# Altium PCB board.PcbDoc
Units mil, origin at the board's own origin, x right, y up, seen from the top; angles counter-clockwise.
Board outline 2300 x 3600 mil, 2 copper layers (Top Layer, Bottom Layer); 46 components, 41 nets, 168 pads, 5 vias.
Unrouted connection lines stored in the file: 35.
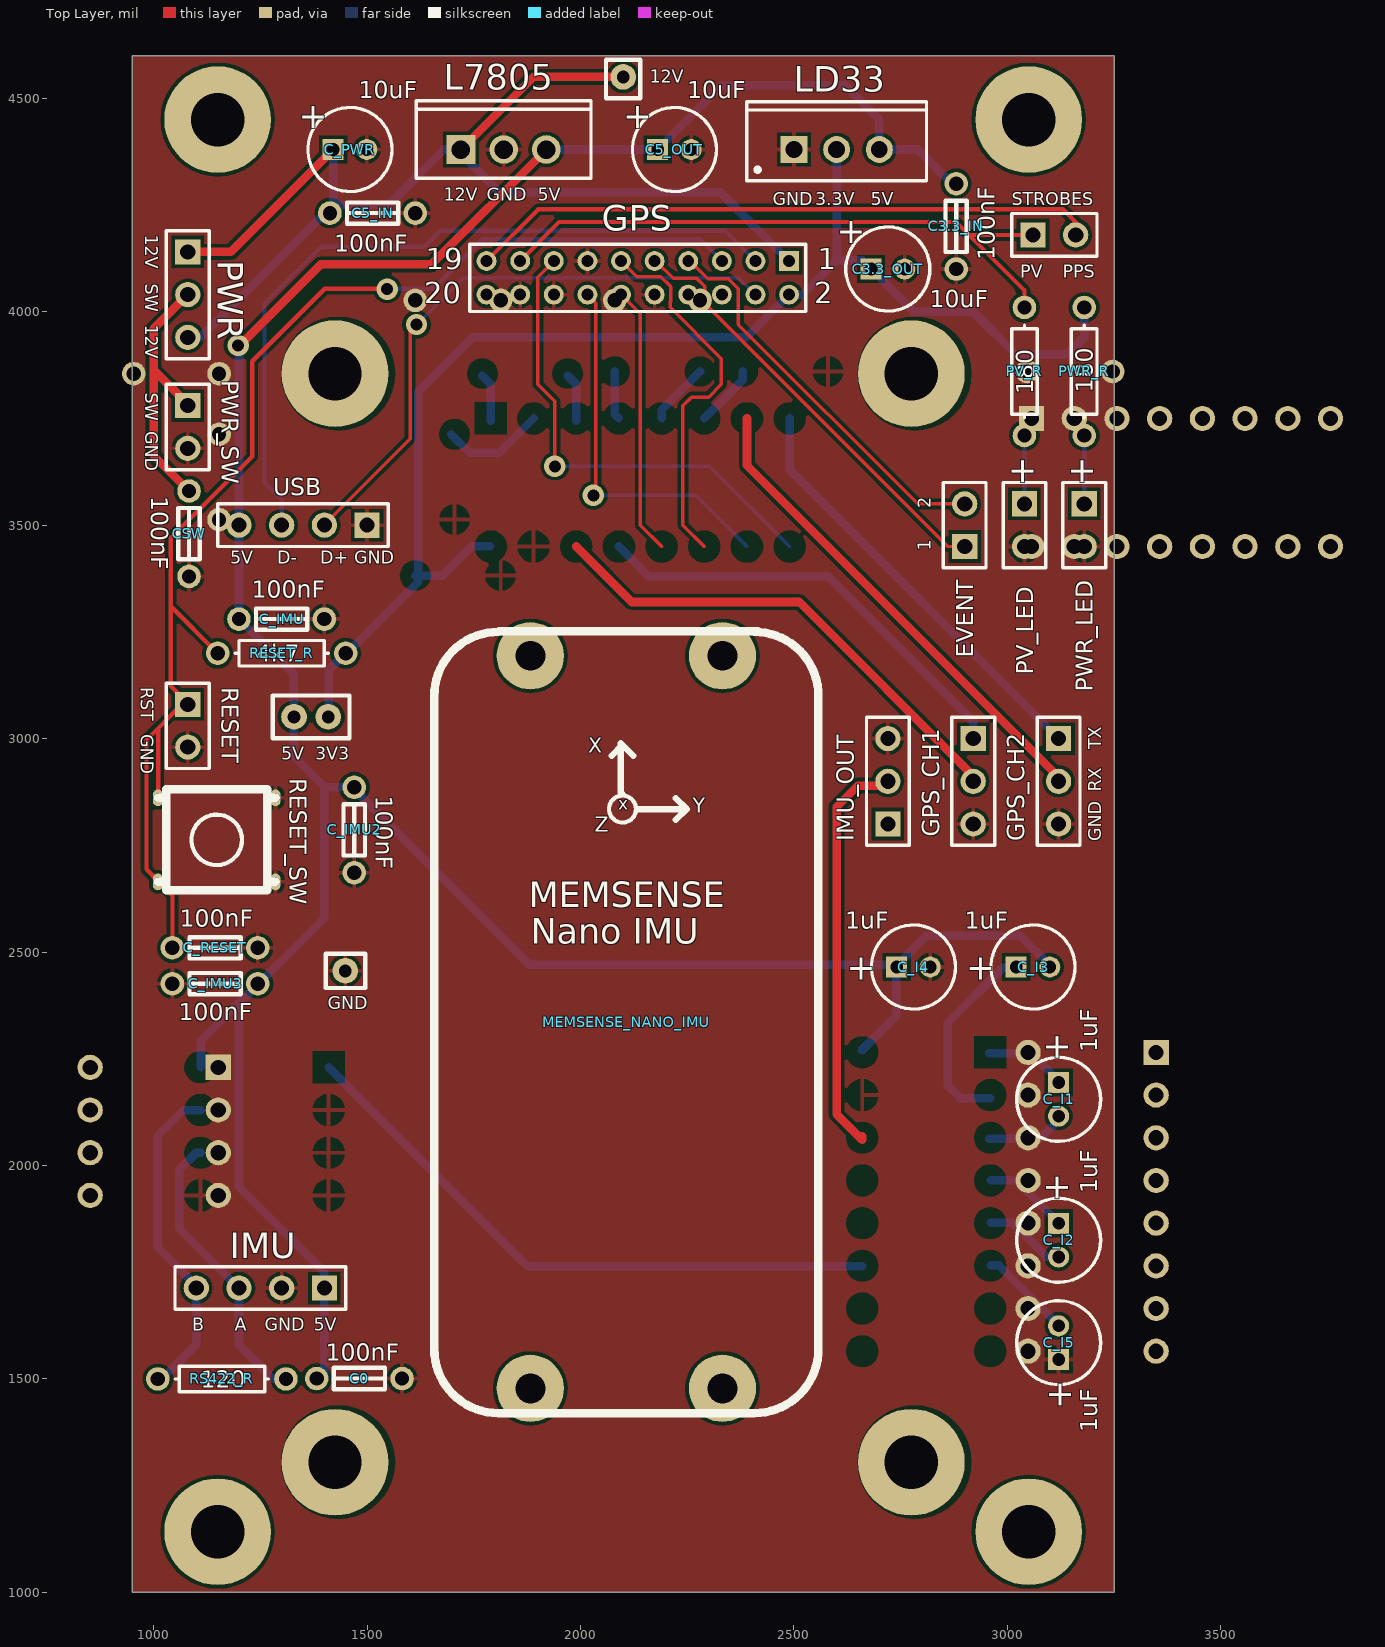
[diagram p0: Top Layer view]
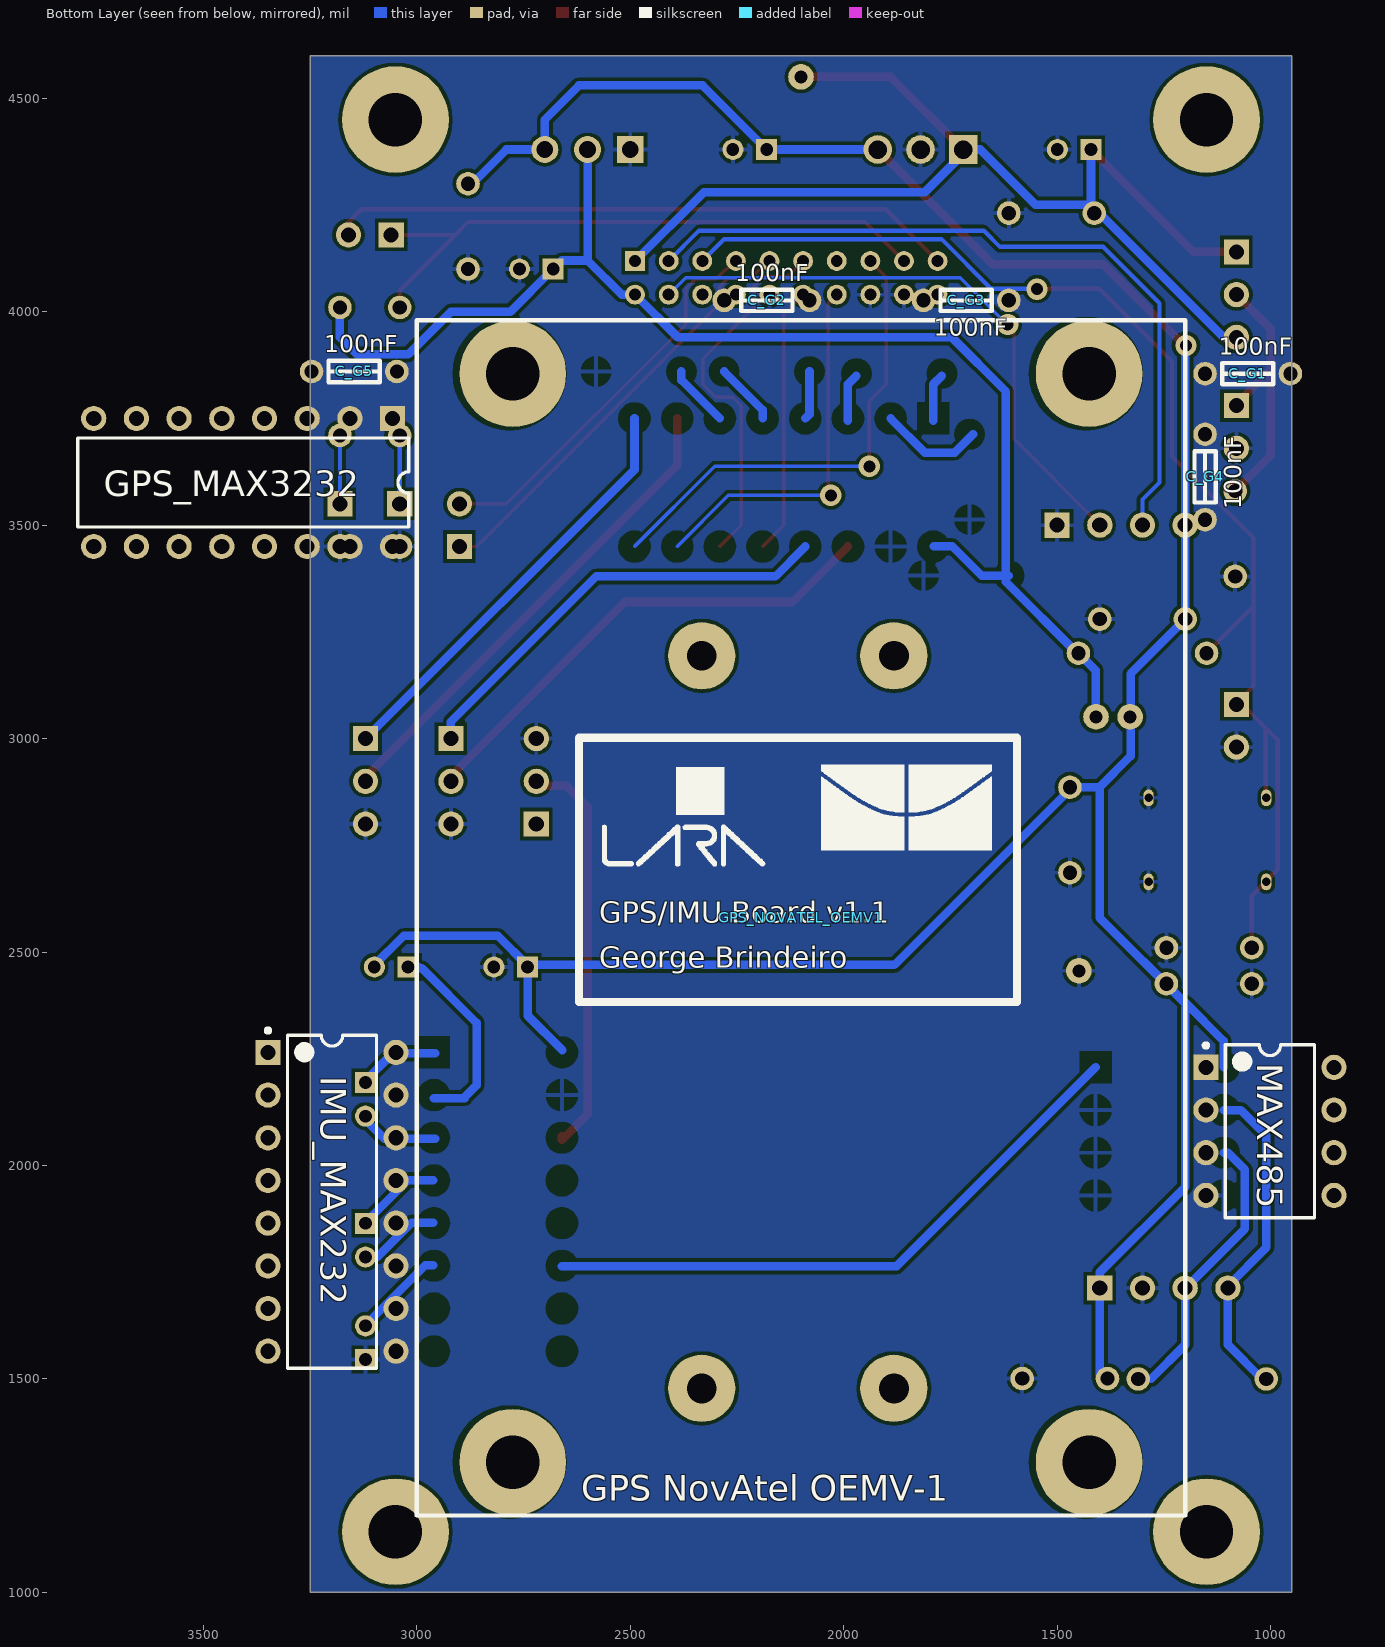
[diagram p1: Bottom Layer view, seen from below]

## Layer stack, top to bottom
Top Solder: solder mask 0.4, Solder Resist, Dk 3.5
Top Layer: signal copper 1.4
Dielectric1: dielectric 12.6, FR-4, Dk 4.8
Bottom Layer: signal copper 1.4
Bottom Solder: solder mask 0.4, Solder Resist, Dk 3.5

## Board outline
950,1000 3250,1000 3250,4600 950,4600

## Design rules (kind name [scope] priority, off if disabled: settings)
Clearance [All] p1: gap=8 ignorepadtopadclearanceinfootprint=FALSE except(0: Arc-Hole Track-Hole SMDPad-Hole THPad-Hole Via-Hole Fill-Hole Poly-Hole Region-Hole Text-Hole)
FabricationTestPointUsage TestPointUsage [All] p1: valid=0 allowmultiple=FALSE
FabricationTestpoint Testpoint [All] p1: side=3 testpointundercomponent=TRUE minsize=40 maxsize=100 preferedsize=60 minholesize=0 maxholesize=40 preferedholesize=32 testpointgrid=1 allowsidetop=TRUE allowsidebottom=TRUE usegrid=TRUE gridtolerance=0.01
HoleSize [All] p1: absolutevalues=TRUE maxlimit=100 minlimit=20 maxpercent=80.000 minpercent=20.000
PolygonConnect [All] p1: connectstyle=Relief reliefconductorwidth=10 reliefentries=4 polygonreliefangle="90 Angle" airgapwidth=10
RoomDefinition schematic [InComponentClass('schematic')] p1: confinementstyle=ConfineIn formatcopy=TRUE lockcomponents=FALSE outline 830,790 63,790 63,4750 830,4750
RoutingVias [All] p1: holewidth=28 width=50 viastyle="Through Hole" minholewidth=28 minwidth=50 maxholewidth=28 maxwidth=50
SilkToSolderMaskClearance SilkscreenOverComponentPads [IsPad] p1: minsilkscreentomaskgap=10 clearancetoexposedcopper=TRUE
SolderMaskExpansion [All] p1: expansion=4
Width [All] p1: maxlimit=20 minlimit=8 preferedwidth=10
26 further rules are at their usual default settings.

## Components (designator, comment, footprint, x,y, rotation, side; value= is the part's Value field where it differs from the comment)
C0 "100nF" C_NANO_HOLES 1582,1501 r180 top
C3.3_IN "100nF" C_NANO_HOLES 2880,4300 r270 top
C3.3_OUT "10uF" B 2720,4100 r0 top
C5_IN "100nF" C_NANO_HOLES 1413,4231 r0 top
C5_OUT "10uF" B 2220,4380 r0 top
C_G1 "100nF" C_NANO_HOLES 1153.43,3855 r180 bottom
C_G2 "100nF" C_NANO_HOLES 2280,4026.57 r180 bottom
C_G3 "100nF" C_NANO_HOLES 1813,4026.57 r180 bottom
C_G4 "100nF" C_NANO_HOLES 1153.43,3513 r90 bottom
C_G5 "100nF" C_NANO_HOLES 3246.57,3860 r180 bottom
C_I1 "1uF" B 3120,2155 r270 top
C_I2 "1uF" B 3120,1825 r270 top
C_I3 "1uF" B 3060,2465 r0 top
C_I4 "1uF" B 2780,2465 r0 top
C_I5 "1uF" B 3120,1585 r90 top
C_IMU "100nF" C_NANO_HOLES 1400,3280 r180 top
C_IMU2 "100nF" C_NANO_HOLES 1470,2686 r90 top
C_IMU3 "100nF" C_NANO_HOLES 1044,2426 r0 top
C_PWR "10uF" B 1460,4380 r0 top
C_RESET "100nF" C_NANO_HOLES 1244,2510 r180 top
CSW "100nF" C_NANO_HOLES 1083,3580 r270 top
EVENT "Header 2" HDR1X2 2900,3450 r90 top
GPS "Header 10X2" HDR2x10_2mm 1780,4040 r0 top
GPS_CH1 "MHDR1X3" HDR1X3 2920,3000 r270 top
GPS_CH2 "MHDR1X3" HDR1X3 3120,3000 r270 top
GPS_MAX3232 "MAX3232EEPE" PE16 3406.74,3600 r0 bottom
GPS_NOVATEL_OEMV1 "Comment" GPS_NOVATEL_OEMV1 2100,2580 r180 bottom
IMU "Header 4" HDR1X4 1400,1713 r180 top
IMU_MAX232 "MAX232ACPE" PE16A 3198.54,1915 r180 bottom
IMU_OUT "MHDR1X3" HDR1X3 2720,2800 r90 top
L7805 "L7805ACV" TO220ABN 1820,4380 r0 top
LD33 "LD33V" T03B 2600,4380 r0 top
MAX485 "MAX485CPA" PA8 1001.46,2080 r180 bottom (schematic designator IMU_MAX485)
MEMSENSE_NANO_IMU "Comment" MEMSENSE_NANO_IMU 1657.46,1420 r0 top
PV_LED "PV" HDR1X2 3040,3550 r270 top
PV_R "180" AXIAL-0.3 3040,3860 r90 top
PWR "Header 3" HDR1X3 1080,4140 r270 top
PWR_LED "PWR" HDR1X2 3180,3550 r270 top
PWR_R "180" AXIAL-0.3 3180,3860 r90 top
PWR_SW "Header 2" HDR1X2 1080,3780 r270 top
RESET "Header 2" HDR1X2 1080,3080 r270 top
RESET_R "4k7" AXIAL-0.3 1300,3200 r0 top
RESET_SW "SW-PB" PUSHBUTTON 1266,2881 r180 top
RS422_R "120" AXIAL-0.3 1160,1500 r180 top
STROBES "Header 2" HDR1X2 3060,4180 r0 top
USB "Header 4" HDR1X4 1500,3500 r180 top

## Footprints (in the part's own frame and the unit in brackets; to place one, negate y for a bottom-side part, rotate by r counter-clockwise, add the part's x,y. Pads: shape width x height; smd on the part's side, far side on the other; paste and mask are expansions set on the pad)
AXIAL-0.3 [mm] "Resistor; 2 Leads"
  round 1.4 hole 0.85: 1(-3.81,0) 2(3.81,0)
  silkscreen extent -2.77,-0.76 2.77,0.76
B [mm] "Capacitor, Electrolytic, Radial; Body 5 x 6.8 mm (Dia.xH typ); Pin Spacing 2 mm (typ)"
  rect 1.25x1.25 hole 0.75: 1(-1,0)
  round 1.25 hole 0.75: 2(1,0)
  silkscreen extent -2.5,-2.5 2.5,2.5
C_NANO_HOLES [mm] "C_NANO com furos maiores"
  round 1.4 hole 0.85: 1(0,0) 2(5.08,0)
  silkscreen extent 1.02,-0.63 4.06,0.64
GPS_NOVATEL_OEMV1 [mil]
  round 250 hole 125: 0(675,1275) 1(-675,1275) 2(-675,-1275) 3(675,-1275)
  silkscreen extent -900,-1400 900,1400
HDR1X2 [mm] "Connector; Header; 2 Position"
  rect 1.5x1.5 hole 0.9: 1(0,0)
  round 1.5 hole 0.9: 2(2.54,0)
  silkscreen extent -1.27,-1.27 3.81,1.27
HDR1X3 [mm] "Connector; Header; 3 Position"
  rect 1.5x1.5 hole 0.9: 1(0,0)
  round 1.5 hole 0.9: 2(2.54,0) 3(5.08,0)
  silkscreen extent -1.27,-1.27 6.35,1.27
HDR1X4 [mm] "Connector; Header; 4 Position"
  rect 1.5x1.5 hole 0.9: 1(0,0)
  round 1.5 hole 0.9: 2(2.54,0) 3(5.08,0) 4(7.62,0)
  silkscreen extent -1.27,-1.27 8.89,1.27
HDR2x10_2mm [mm]
  rect 1.18x1.18 hole 0.71: 1(18,2)
  round 1.18 hole 0.71: 2(18,0) 3(16,2) 4(16,0) 5(14,2) 6(14,0) 7(12,2) 8(12,0) 9(10,2) 10(10,0) 11(8,2) 12(8,0) 13(6,2) 14(6,0) 15(4,2) 16(4,0) 17(2,2) 18(2,0) 19(0,2) 20(0,0)
  silkscreen extent -1,-1 19,3
MEMSENSE_NANO_IMU [mil]
  round 157.48 hole 70: 0(225,1774) 1(675,1774) 2(225,58) 3(675,58)
  silkscreen extent 0,0 900,1832
PA8 [mm] "DIP, 8-Leads, Row Spacing 7.62mm, Pitch 2.54mm, Body 9.38x7.24mm"
  rect 1.5x1.5 hole 0.9: 1(-3.81,3.81)
  round 1.5 hole 0.9: 2(-3.81,1.27) 3(-3.81,-1.27) 4(-3.81,-3.81) 5(3.81,-3.81) 6(3.81,-1.27) 7(3.81,1.27) 8(3.81,3.81)
  silkscreen extent -3.94,-5.15 2.65,5.23, body extent -3.6,-5.15 3.6,5.15, height 4.58
PE16 [mm] "DIP; 16 Leads; Row Spacing 7.62 mm; Pitch 2.54 mm"
  rect 1.5x1.5 hole 0.9: 1(-8.89,-3.81)
  round 1.5 hole 0.9: 2(-6.35,-3.81) 3(-3.81,-3.81) 4(-1.27,-3.81) 5(1.27,-3.81) 6(3.81,-3.81) 7(6.35,-3.81) 8(8.89,-3.81) 9(8.89,3.81) 10(6.35,3.81) 11(3.81,3.81) 12(1.27,3.81) 13(-1.27,3.81) 14(-3.81,3.81) 15(-6.35,3.81) 16(-8.89,3.81)
  silkscreen extent -9.85,-2.65 9.85,2.65
PE16A [mm] "DIP, 16-Leads, Row Spacing 7.62mm, Pitch 2.54mm, Body 19.18x6.99mm"
  rect 1.5x1.5 hole 0.9: 1(-3.81,8.89)
  round 1.5 hole 0.9: 2(-3.81,6.35) 3(-3.81,3.81) 4(-3.81,1.27) 5(-3.81,-1.27) 6(-3.81,-3.81) 7(-3.81,-6.35) 8(-3.81,-8.89) 9(3.81,-8.89) 10(3.81,-6.35) 11(3.81,-3.81) 12(3.81,-1.27) 13(3.81,1.27) 14(3.81,3.81) 15(3.81,6.35) 16(3.81,8.89)
  silkscreen extent -3.94,-9.9 2.65,10.31, body extent -3.3,-9.9 3.3,9.9, height 5.08
PUSHBUTTON [mm]
  oval 0.6x1 hole 0.5: 1(-0.5,5.5) 1(-0.5,0.5) 2(6.5,5.5) 2(6.5,0.5)
  silkscreen extent -0.5,0 6.5,6
T03B [mm] "TO, Thru-Hole, Vertical, Heatsink Mounted; 3 In-Line Leads; Pitch 2.54 mm"
  rect 1.6x1.6 hole 1: 1(-2.54,0)
  round 1.6 hole 1: 2(0,0) 3(2.54,0)
  silkscreen extent -5.35,-1.85 5.35,2.85, body extent -5.4,-1.9 5.4,2.9, height 19.4
TO220ABN [mm] "TO, Thru-Hole, Vertical, Heatsink Mounted; 3 In-Line Leads; Pitch 2.54 mm; Pin sequence 1, 3, 2"
  rect 1.7x1.7 hole 1.1: 1(-2.54,0)
  round 1.7 hole 1.1: 2(2.54,0) 3(0,0)
  silkscreen extent -5.2,-1.7 5.2,2.9

## Part data
C0 C3.3_IN C5_IN C_G1 C_G2 C_G3 C_G4 C_G5 C_IMU C_IMU2 C_IMU3 C_RESET CSW: library part Cap, "Capacitor"
C3.3_OUT C5_OUT C_I1 C_I2 C_I3 C_I4 C_I5 C_PWR: library part "Cap Pol1", "Polarized Capacitor (Radial)"
EVENT STROBES: "Header, 2-Pin"
GPS: "Header, 10-Pin, Dual row"
GPS_CH1 GPS_CH2 IMU_OUT: "Header, 3-Pin"
GPS_MAX3232: "±15kV ESD-Protected, 3.0V to 5.5V, Low-Power, up to 250kbps, True RS-232 Transceiver"
IMU USB: "Header, 4-Pin"
IMU_MAX232: "+5V Powered, Multi-Channel RS-232 Driver/Receiver"
L7805: "Precision 1A Regulator"
LD33: library part LM1117T-3.3, "800mA Low-Dropout Linear Regulator"
MAX485: "Low-Power, Slew-Rate-Limited RS-485/RS-422 Transceiver"
PV_LED PWR_LED: library part LED0, "Typical INFRARED GaAs LED"
PV_R PWR_R RESET_R RS422_R: library part Res1, "Resistor"
PWR: library part "Header 3H", "Header, 3-Pin, Right Angle"
PWR_SW RESET: library part "Header 2H", "Header, 2-Pin, Right Angle"
RESET_SW: "Switch"

## Free pads (board coordinates)
  round 250 hole 125: 0(1150,4450) 1(3050,4450) 2(3050,1142) 3(1150,1142)
  round 60 hole 30: 0(1329,3051) 1(1409,3051) 2(2100,4550) 3(1449,2456)

## Via types
v1: diameter 50, hole 28, Top Layer to Bottom Layer, 5 vias

## Nets (pads, with @x,y where several pads share a name; then routed paths per layer and width w, separated by ;. In a path a pad name is that pad's centre, name@x,y a point inside that pad or via, vN(x,y) a via of type N, cw(c..) or ccw(c..) an arc to the next point about the centre after c; other vN are vias at no path point)
3.3V: C3.3_OUT.1 C_G3.2 GPS.2 GPS_MAX3232.16 LD33.2 pad.1@1409,3051 PWR_R.2 RESET_R.2 | length 3169.2
  Bottom Layer w20: pad.1@1410,3052 1410,3160 RESET_R.2 1453,3200 1620,3367 1620,3382 ; 1613,3382 1620,3382 ; 1789,3451 1746,3451 1677,3382 1620,3382 ; LD33.2 2600,4120 ; PWR_R.2@3180,4000 3180,3940 3140,3900 3020,3900 2920,4000 2780.63,4000 C3.3_OUT.1 2660.63,4120 2600,4120 ; 1620,3382 1620,3813 1747,3940 2388.66,3940 GPS.2 2520,4040 2600,4120
5V: C0.2 C3.3_IN.1 C5_OUT.1 C_I3.2 C_I4.1 C_IMU2.2 C_IMU3.2 C_IMU.2 IMU.1 IMU_MAX232.16 L7805.2 LD33.3 MAX485.8 pad.0@1329,3051 USB.4 | length 7065.8
  Top Layer w20: v1@1199.5,3918.5 1392,4111 1651,4111 L7805.2
  Bottom Layer w20: 1110,2230 1110,2292 1198,2380 1200,2380 1400,2580 1400,2887 1328,2959 1328,3152 C_IMU.2 USB.4 1200,3917 1203,3920 1202,3921 v1(1198,3921) ; 1200,2370 1200,1950 1400,1750 IMU.1 C0.2@1400,1500 ; 1401,2886 C_IMU2.2 ; C_IMU2.2@1471,2880 1881,2470 2738,2470 C_I4.1@2740,2468 ; L7805.2 C5_OUT.1 2330.63,4530 2620,4530 2700,4450 LD33.3 2790,4380 C3.3_IN.1@2865,4305 ; 2659,2270 2740,2351 C_I4.1@2740,2468 ; C_I4.1@2739,2467 C_I4.1@2740,2468 ; C_I3.2@3100,2469 3031,2538 2810,2538 C_I4.1@2740,2468
12V: C5_IN.1 C_PWR.1 GPS.1 L7805.1 pad.2@2100,4550 PWR.1 PWR.3 | length 2724.8
  Top Layer w20: PWR.1 1180.63,4140 C_PWR.1 ; L7805.1@1720,4370 L7805.1 1890,4550 pad.2@2100,4550
  Bottom Layer w20: PWR.3 1110,3940 C5_IN.1@1420.63,4250.63 ; C_PWR.1 C5_IN.1@1420.63,4250.63 ; L7805.1@1720,4370 1810,4280 2327.4,4280 GPS.1 ; L7805.1 1680,4380 1550.63,4250.63 1489.37,4250.63 C5_IN.1@1420.63,4250.63
GND: C0.1 C3.3_IN.2 C3.3_OUT.2 C5_IN.2 C5_OUT.2 C_G3.1 C_G4.1 C_G5.1 C_I4.2 C_I5.1 C_IMU2.1 C_IMU3.1 C_IMU.1 C_PWR.2 C_RESET.1 CSW.2 GPS.10 GPS.13 GPS.16 GPS.18 GPS_CH1.3 GPS_CH2.3 GPS_MAX3232.15 IMU.2 IMU_MAX232.15 IMU_OUT.3 L7805.3 LD33.1 MAX485.2 MAX485.3 MAX485.4 MAX485.5 pad.3@1449,2456 PV_LED.2 PWR_LED.2 PWR_SW.2 RESET.2 RESET_SW.1 USB.1
GPS_CAN2_RX: GPS.8
GPS_CAN2_TX: GPS.20
GPS_COM1_RX: GPS.12 GPS_MAX3232.12 | length 629.4
  Top Layer w8: GPS.12 2140,3994.96 2140,3500 2190,3450
GPS_COM1_TX: GPS.11 GPS_MAX3232.11 | length 895
  Top Layer w8: GPS.11@2094.96,4105.04 GPS.11 2132.19,4081.51 2188.49,4081.51 2210.93,4059.07 2210.93,4024.58 2210,4023.65 2210,4010 2330,3890 2330,3830 2300,3800 2260,3800 2240,3780 2240,3500 2290,3450
GPS_COM2_RX: GPS.15 GPS_MAX3232.9 | length 1140.7
  Top Layer w8: GPS.15 1900,4081.26 1900,3830 1940,3790 v1(1940,3637.97)
  Bottom Layer w8: v1(1940,3637.97) 2302.03,3637.97 2490,3450
GPS_COM2_TX: GPS.14 GPS_MAX3232.10 | length 890.4
  Top Layer w8: GPS.14 2036,4020.22 2036,3576 v1(2030,3570)
  Bottom Layer w8: v1(2030,3570) 2270,3570 2390,3450
GPS_EVENT1: EVENT.1 GPS.9 | length 1026.7
  Top Layer w8: GPS.9@2176.01,4118.74 2176.72,4118.74 2217.23,4078.23 2271.77,4078.23 2290.67,4059.33 2290.67,4019.33 2860,3450 EVENT.1
  Top Layer w10: GPS.9 GPS.9@2176.01,4118.74
GPS_EVENT2: EVENT.2 GPS.7 | length 932.2
  Top Layer w8: GPS.7 2256.72,4118.74 2298.23,4077.23 2346.6,4077.23 2370,4053.83 2370,3970 2790,3550 EVENT.2
GPS_PPS: GPS.19 STROBES.2 | length 1476.8
  Top Layer w10: GPS.19 1901.26,4240 3130,4240 3170,4200 STROBES.2@3170,4180
GPS_PV: GPS.17 PV_R.2 STROBES.1 | length 1503.6
  Top Layer w10: GPS.17 1950,4210 2880,4210 2910,4180 ; PV_R.2 3040,4050 2910,4180 ; STROBES.1 2910,4180
  Bottom Layer w20: STROBES.1@3040,4160 STROBES.1
GPS_RESETIN: C_RESET.2 GPS.5 RESET.1 RESET_R.1 RESET_SW.2 | length 3083.1
  Top Layer w8: RESET.1@1066,3080 RESET.1@1070,3080
  Top Layer w10: RESET_SW.2@1010,2666 1044,2632 C_RESET.2 ; RESET_SW.2@1011,2666 983.09,2693.91 983.09,2997.09 RESET.1@1066,3080 ; RESET_SW.2@1011,2863 1011,3022 ; RESET.1@1080,3083 1040,3123 1040,3310 ; RESET_R.1 1040,3310 ; v1@1546,4054 1401,4054 1231,3884 1231,3661 1040,3470 1040,3310
  Bottom Layer w10: v1@1548,4054 1655,4054 1771,4170 2279.92,4170 GPS.5
  other v1: 1547,4053
GPS_USB_D+: GPS.4 USB.2 | length 1414.7
  Top Layer w8: USB.2 1400,3501 1601,3702 1601,3955 v1(1616,3970)
  Bottom Layer w8: v1@1619,3969 1619,3972 1727,4080 2369.92,4080 GPS.4
GPS_USB_D-: GPS.3 USB.3 | length 1786.4
  Bottom Layer w10: USB.3 1300,3560 1260,3600 1260,4020 1392,4152 1634,4152 1672,4190 2338.66,4190 GPS.3
GPS_VARF: GPS.6
IMU_HRS_A: IMU.3 MAX485.6 RS422_R.1 | length 677.3
  Bottom Layer w20: 1110,2030 1100,2030 1060.47,1990.47 1060.47,1851.53 1200,1712 1200,1580 1280,1500 RS422_R.1
IMU_HRS_B: IMU.4 MAX485.7 RS422_R.2 | length 775.3
  Bottom Layer w20: RS422_R.2 1020,1500 1100,1580 IMU.4 1100,1718 1010,1808 1010,2070 1070,2130 1110,2130
IMU_TX: IMU_MAX232.11 MAX485.1 | length 1443
  Bottom Layer w20: 1410,2230 1876,1764 2660,1764
J1_RX: GPS_CH1.2 GPS_MAX3232.14 | length 1152.6
  Top Layer w20: 1990,3450 2120,3320 2512.66,3320 GPS_CH1.2@2920,2912.66
J1_TX: GPS_CH1.1 GPS_MAX3232.13 | length 1039.8
  Bottom Layer w20: 2090,3450 2160,3380 2580,3380 2920,3040 GPS_CH1.1
J2_RX: GPS_CH2.2 GPS_MAX3232.7 | length 1142.4
  Top Layer w20: 2390,3750 2390,3640 GPS_CH2.2@3120,2910
J2_TX: GPS_CH2.1 GPS_MAX3232.8 | length 1011
  Bottom Layer w20: 2490,3750 2490,3630 GPS_CH2.1
J3_RX: IMU_MAX232.14 IMU_OUT.2 | length 954.6
  Top Layer w20: 2660,2069 2660,2060 2600,2120 2600,2840 2650,2890 IMU_OUT.2@2720,2890
NetC_G1_1: C_G1.1 GPS_MAX3232.3 | length 113.3
  Bottom Layer w20: 1970,3850 1990,3830 1990,3745
NetC_G1_2: C_G1.2 GPS_MAX3232.1 | length 113.3
  Bottom Layer w20: 1770,3850 1790,3830 1790,3745
NetC_G2_1: C_G2.1 GPS_MAX3232.5 | length 147.3
  Bottom Layer w20: 2190,3750 2190,3770 2280,3860
NetC_G2_2: C_G2.2 GPS_MAX3232.4 | length 114.1
  Bottom Layer w20: 2080,3860 2080,3760 2090,3750
NetC_G4_2: C_G4.2 GPS_MAX3232.2 | length 243.9
  Bottom Layer w20: 1697,3713 1740,3670 1810,3670 1890,3750
NetC_G5_2: C_G5.2 GPS_MAX3232.6 | length 147.3
  Bottom Layer w20: 2290,3750 2380,3840 2380,3860
NetC_I1_1: C_I1.1 IMU_MAX232.1 | length 199.3
  Bottom Layer w20: 2957,2263 3056.37,2263 C_I1.1@3127,2192.37
NetC_I1_2: C_I1.2 IMU_MAX232.3 | length 191
  Bottom Layer w20: 2957,2063 3076.37,2063 C_I1.2@3127,2113.63
NetC_I2_1: C_I2.1 IMU_MAX232.4 | length 201.7
  Bottom Layer w20: 2961,1966 3020.37,1966 C_I2.1@3121,1865.37
NetC_I2_2: C_I2.2 IMU_MAX232.5 | length 192.9
  Bottom Layer w20: 2961,1866 3012,1866 3091.37,1786.63 C_I2.2@3121,1786.63
NetC_I3_1: C_I3.1 IMU_MAX232.2 | length 479.7
  Bottom Layer w20: 2960,2158 2888,2158 2889,2159 2860,2188 2860,2334 2988,2462 2999.26,2462 2996.26,2465 C_I3.1@3019,2465
NetC_I5_2: C_I5.2 IMU_MAX232.6 | length 218.3
  Bottom Layer w20: 2961,1766 2980.37,1766 C_I5.2@3121,1625.37
NetPV_LED_1: PV_LED.1 PV_R.1 | length 160
  Bottom Layer w10: PV_LED.1 PV_R.1
NetPWR_LED_1: PWR_LED.1 PWR_R.1 | length 160
  Bottom Layer w10: PWR_LED.1 PWR_R.1
PWR_SW_2: CSW.1 PWR.2 PWR_SW.1 | length 658.8
  Top Layer w20: PWR_SW.1 1080,3784 1000,3864 ; CSW.1 1000,3663 1000,3864 ; PWR.2@1090,4050 PWR.2 1000,3960 1000,3864
pads on no net: GPS_NOVATEL_OEMV1.0 GPS_NOVATEL_OEMV1.1 GPS_NOVATEL_OEMV1.2 GPS_NOVATEL_OEMV1.3 IMU_MAX232.7 IMU_MAX232.8 IMU_MAX232.9 IMU_MAX232.10 IMU_MAX232.12 IMU_MAX232.13 IMU_OUT.1 MEMSENSE_NANO_IMU.0 MEMSENSE_NANO_IMU.1 MEMSENSE_NANO_IMU.2 MEMSENSE_NANO_IMU.3

## Polygon pours and split planes (outlines as drawn)
GND on Top Layer "Top-GND" (solid, remove dead copper, pour order 8): 950,1000 3250,1000 3250,4600 950,4600 950,1000
GND on Bottom Layer "Bottom-GND" (solid, remove dead copper, pour order 10): 950,1000 3250,1000 3250,4600 950,4600 950,1000

## Silkscreen, mask and mechanical layers (free items; w line width, h text height)
Top Overlay:
  lines w10: 1279,3001 1459,3001 1459,3101 1279,3101 1279,3001 ; 1403,2416 1496,2416 1496,2496 1403,2496 1403,2416 ; 2060,4500 2060,4590 2140,4590 2140,4500 2060,4500
  text "12V" at 2162,4536 h30
  text "12V" at 1680,4260 h30
  text "GND" at 1780,4260 h30
  text "5V" at 1900,4260 h30
  text "GND" at 2450,4250 h30
  text "3.3V" at 2550,4250 h30
  text "5V" at 2680,4250 h30
  text "12V" at 980,4180 h30 r270
  text "PV" at 3030,4080 h30
  text "PPS" at 3130,4080 h30
  text "SW" at 980,4064.99 h30 r270
  text "12V" at 980,3970 h30 r270
  text "SW" at 980,3810 h30 r270
  text "GND" at 980,3720 h30 r270
  text "+" at 3010.01,3660 h60 r270
  text "+" at 3150.01,3660 h60 r270
  text "2" at 2820,3540 h30 r90
  text "1" at 2820,3440 h30 r90
  text "5V" at 1180,3410 h30
  text "D-" at 1290,3410 h30
  text "D+" at 1390,3410 h30
  text "GND" at 1470,3410 h30
  text "RST" at 970,3120 h30 r270
  text "GND" at 970,3010 h30 r270
  text "TX" at 3220,2975.01 h30 r90
  text "5V" at 1299,2951 h30
  text "3V3" at 1379,2951 h30
  text "RX" at 3220,2875.01 h30 r90
  text "GND" at 3220,2760.01 h30 r90
  text "GND" at 1408,2366 h30
  text "B" at 1090,1613 h30
  text "A" at 1190,1613 h30
  text "GND" at 1260.01,1613 h30
  text "5V" at 1375.01,1613 h30
Bottom Overlay:
  drawing of 1222 lines, arcs and shapes, not listed
  text "GPS/IMU Board v1.1" at 2572,2569 h50
  text "George Brindeiro" at 2572,2463 h50

## Text inside footprints (layer, text, board x,y; h text height)
C3.3_OUT: Top Overlay "+" at 2600,4160 h59.06
C5_OUT: Top Overlay "+" at 2100,4430 h59.06
C_I1: Top Overlay "+" at 3090.47,2311.5 h59.06 r270
C_I2: Top Overlay "+" at 3090.47,1981.5 h59.06 r270
C_I3: Top Overlay "+" at 2903.5,2435.47 h59.06
C_I4: Top Overlay "+" at 2623.5,2435.47 h59.06
C_I5: Top Overlay "+" at 3149.53,1428.5 h59.06 r90
C_PWR: Top Overlay "+" at 1340,4430 h59.06
GPS: Top Overlay "20" at 1633.87,4020.31 h50; Top Overlay "19" at 1638.04,4099.06 h50; Top Overlay "1" at 2556.05,4099.06 h50; Top Overlay "2" at 2547.72,4020.31 h50
GPS_NOVATEL_OEMV1: Bottom Overlay "GPS NovAtel OEMV-1" at 2615,1215 h60
MEMSENSE_NANO_IMU: Top Overlay "Z" at 2033.46,2770 h60; Top Overlay "Y" at 2263.46,2815 h60; Top Overlay "X" at 2018.46,2955 h60; Top Overlay "x" at 2088.46,2823 h50; Top Overlay "MEMSENSE" at 1878.46,2605 h60; Top Overlay "Nano IMU" at 1883.53,2520 h60